# Allegro board C6503D_7_2.brd
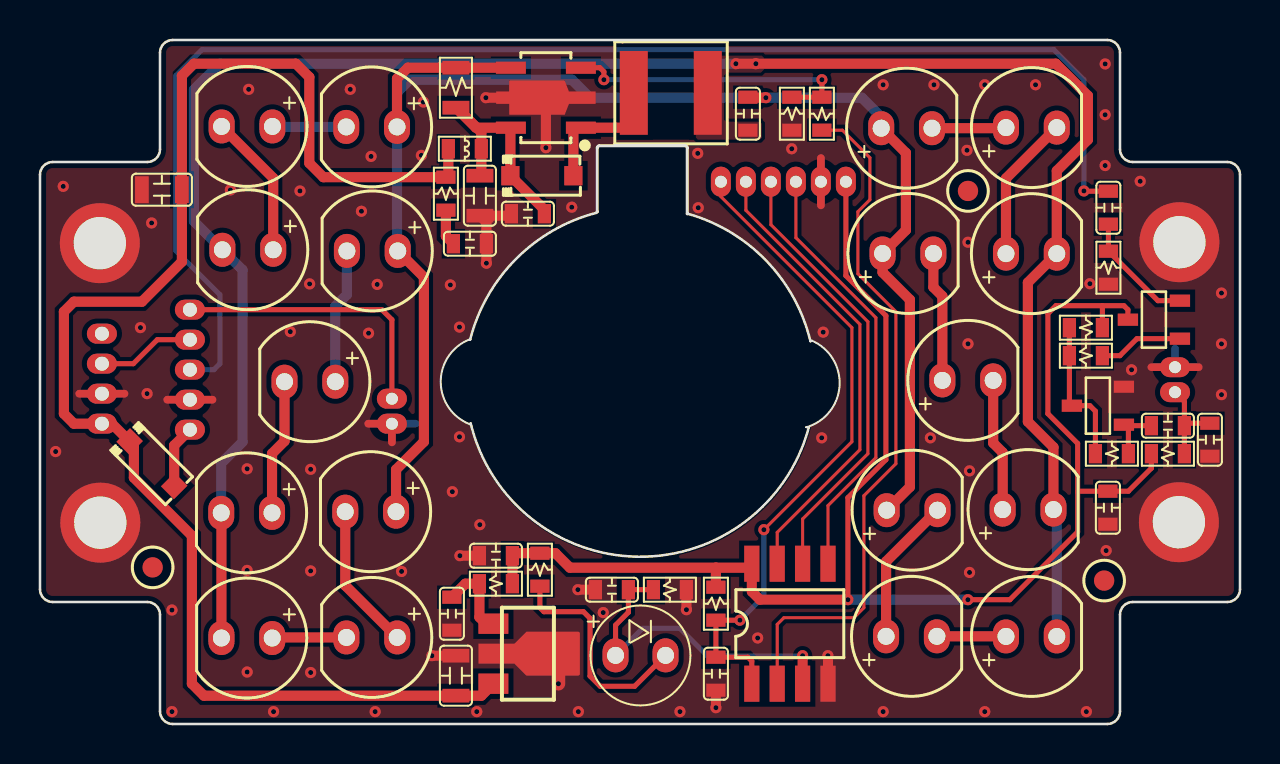
[diagram p0: board, top side]
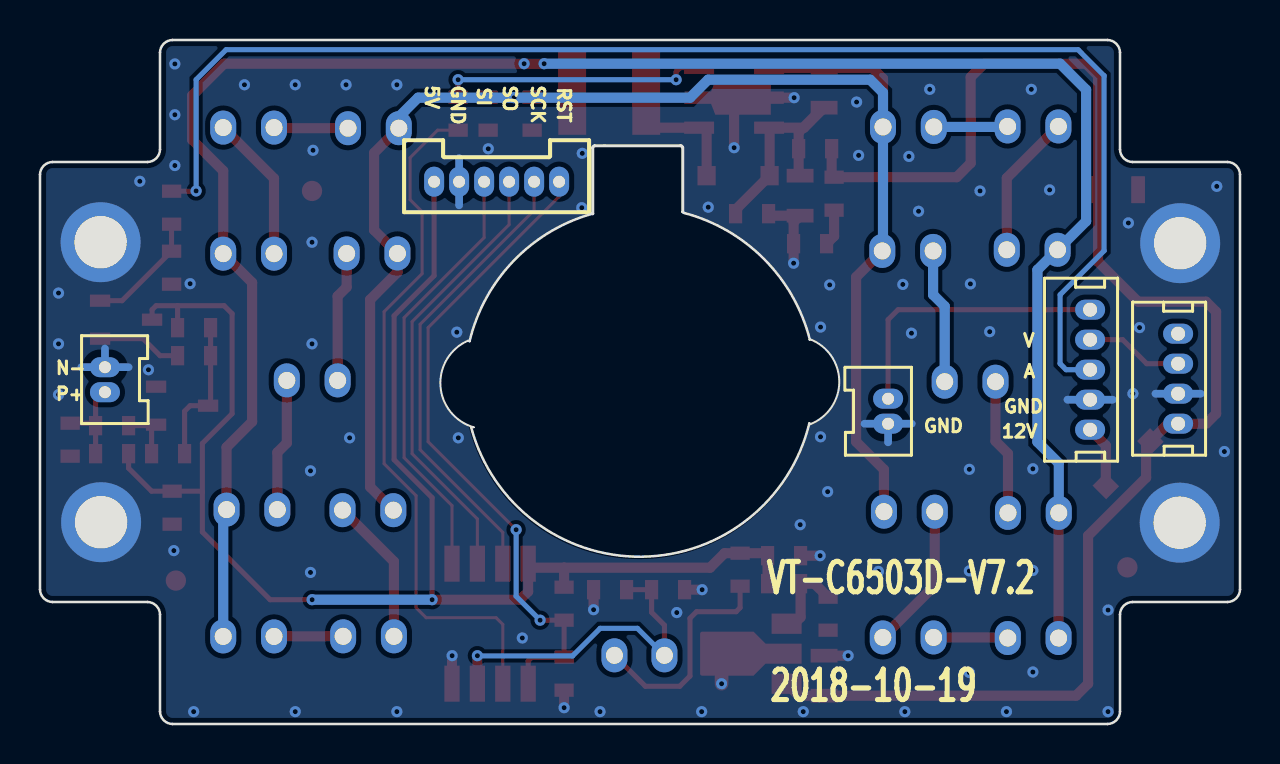
[diagram p1: board, bottom side, seen from below]

Outline 60 x 34.2 mm; copper layers: TOP, BOTTOM. Coordinates in mm from the lower left corner of the outline.
Outline path: 1.74,24.04 arc(4.24,24.09) 1.75,23.94 ; 1.77,10.07 arc(4.27,10.12) 1.77,9.97 ; 21.49,14.99 arc(20.04,17.12) 21.5,19.24 ; 21.51,19.22 arc(23.8,23.25) 27.81,25.56 ; 27.86,25.61 27.86,28.81 arc(27.89,28.88) 27.96,28.91 32.26,28.91 arc(32.33,28.88) 32.36,28.81 32.36,25.51 ; 31.8,28.94 arc(31.76,28.9) 31.73,28.94 ; 32.4,25.51 arc(36.32,23.15) 38.52,19.14 ; 38.44,14.83 arc(29.91,8.36) 21.53,15.03 ; 38.6,19.17 arc(39.98,16.9) 38.31,14.84 ; 55.7,10.09 arc(58.19,10.14) 55.7,9.99 ; 55.72,24.09 arc(58.22,24.14) 55.72,23.99 ; 0,27.46 0,6.74 arc(0.19,6.29) 0.63,6.1 5.37,6.1 arc(5.81,5.91) 6,5.47 6,0.63 arc(6.19,0.19) 6.64,0 53.36,0 arc(53.81,0.19) 54,0.63 54,5.47 arc(54.19,5.91) 54.63,6.1 59.37,6.1 arc(59.81,6.29) 60,6.74 60,27.46 arc(59.81,27.91) 59.37,28.1 54.63,28.1 arc(54.19,28.29) 54,28.73 54,33.57 arc(53.81,34.01) 53.36,34.2 6.64,34.2 arc(6.19,34.01) 6,33.57 6,28.73 arc(5.81,28.29) 5.37,28.1 0.63,28.1 arc(0.19,27.91) 0,27.46 ; 21.47,14.99 arc(21.49,15.01) 21.52,14.99 arc(21.49,14.96) 21.47,14.99 ; 21.48,19.22 arc(21.51,19.25) 21.54,19.22 arc(21.51,19.19) 21.48,19.22 ; 21.48,19.24 arc(21.5,19.26) 21.53,19.24 arc(21.5,19.21) 21.48,19.24 ; 21.5,15.03 arc(21.53,15.06) 21.57,15.03 arc(21.53,15) 21.5,15.03 ; 27.78,25.56 arc(27.81,25.59) 27.84,25.56 arc(27.81,25.52) 27.78,25.56 ; 27.83,25.61 arc(27.86,25.65) 27.9,25.61 arc(27.86,25.57) 27.83,25.61 ; 32.33,25.51 arc(32.36,25.55) 32.4,25.51 arc(32.36,25.47) 32.33,25.51 ; 32.37,25.51 arc(32.4,25.54) 32.43,25.51 arc(32.4,25.48) 32.37,25.51 ; 38.29,14.84 arc(38.31,14.86) 38.34,14.84 arc(38.31,14.81) 38.29,14.84 ; 38.41,14.83 arc(38.44,14.86) 38.47,14.83 arc(38.44,14.8) 38.41,14.83 ; 38.49,19.14 arc(38.52,19.17) 38.55,19.14 arc(38.52,19.11) 38.49,19.14 ; 38.57,19.17 arc(38.6,19.19) 38.62,19.17 arc(38.6,19.14) 38.57,19.17

## Placement (name value [footprint] x y rotation side)
C1  10uF 16V  [C0805]  6.09 26.72 180 top
C2  100nF 50V  [C0603]  21.49 24.02 0 top
C3  10uF 16V  [C0805]  22 26.42 270 top
C4  1uF 25V  [C0603]  24.39 25.52 180 top
C5  1uF 25V  [C0603]  35.39 30.52 90 top
C6  10uF 10V  [C0603]  20.59 5.52 270 top
C7  10uF 16V  [C0805]  20.8 2.42 90 top
C8  1uF 25V  [C0603]  53.39 10.82 270 top
C9  100nF 50V  [C0603]  22.8 8.42 180 top
C10  100nF 50V  [C0603]  56.4 14.92 180 top
C11  1uF 25V  [C0603]  53.42 25.82 90 top
C12  100nF 50V  [C0603]  58.49 14.22 270 top
C13  100nF 50V  [C0603]  28.6 6.72 180 top
C14  100nF 50V  [C0603]  33.8 2.52 270 top
D1  1N5819HW  [SOD123]  25.09 27.42 0 top
D2  1N5819HW  [SOD123]  5.59 13.02 315 top
D3  IR-90  [LED_DIP_I2_54_F5]  10.33 10.56 180 top
D4  IR-90  [LED_DIP_I2_54_F5]  10.39 23.71 180 top
D5  IR-90  [LED_DIP_I2_54_F5]  10.34 4.3 180 top
D6  IR-90  [LED_DIP_I2_54_F5]  49.57 4.38 0 top
D7  IR-90  [LED_DIP_I2_54_F5]  49.4 10.72 0 top
D8  IR-90  [LED_DIP_I2_54_F5]  49.57 23.52 0 top
D9  IR-90  [LED_DIP_I2_54_F5]  13.5 17.12 180 top
D10  IR-90  [LED_DIP_I2_54_F5]  10.35 29.88 180 top
D11  IR-90  [LED_DIP_I2_54_F5]  16.59 4.33 180 top
D12  IR-90  [LED_DIP_I2_54_F5]  43.57 4.38 0 top
D13  IR-90  [LED_DIP_I2_54_F5]  46.39 17.18 0 top
D14  IR-90  [LED_DIP_I2_54_F5]  49.57 29.82 0 top
D15  IR-90  [LED_DIP_I2_54_F5]  16.62 23.65 180 top
D16  IR-90  [LED_DIP_I2_54_F5]  16.58 29.85 180 top
D17  IR-90  [LED_DIP_I2_54_F5]  16.53 10.62 180 top
D18  IR-90  [LED_DIP_I2_54_F5]  43.6 10.69 0 top
D19  IR-90  [LED_DIP_I2_54_F5]  43.4 23.53 0 top
D20  IR-90  [LED_DIP_I2_54_F5]  43.33 29.79 0 top
D21  TACA30  [CDS]  28.78 3.43 0 top
H1  F4_D2.5  [H_4D2_5]  2.99 24.04 0 top
H2  F4_D2.5  [H_4D2_5]  3.02 10.07 0 top
H3  F4_D2.5  [H_4D2_5]  56.97 24.09 0 top
H4  F4_D2.5  [H_4D2_5]  56.95 10.09 0 top
J1  DIP 5P 1.5MM  [DIP_1X5P_I1_5_V]  7.49 14.72 90 bottom
J2  DIP 2P 1.25MM  [DIP_1X2P_1_25_V]  17.59 15.02 90 bottom
J3  DIP 4P 1.5MM  [DIP_1X4P_I1_5_V]  3.09 15.02 90 bottom
J4  DIP 2P 1.25MM  [DIP_1X2P_1_25_V]  56.75 17.84 270 bottom
J5  DIP 6P 1.25MM  [DIP_1X6P_1_25_V]  40.29 27.12 180 bottom
L1  100uH/0.57A  [L_5X5MM]  31.51 31.56 0 top
LB1  1000R/800mA  [L0603]  21.24 28.76 0 top
NOREF  -  []  42.33 10.69 0 top
NOREF#2  -  []  9.07 4.3 0 top
NOREF#3  -  []  9.12 23.71 0 top
NOREF#4  -  []  48.3 29.82 0 top
NOREF#5  -  []  42.06 29.79 0 top
NOREF#6  -  []  12.23 17.12 0 top
NOREF#7  -  []  48.13 10.72 0 top
NOREF#8  -  []  48.3 4.38 0 top
NOREF#9  -  []  42.13 23.53 0 top
NOREF#10  -  []  15.35 23.65 0 top
NOREF#11  -  [unnamed#2]  5.63 7.83 0 top
NOREF#12  -  [unnamed#2]  46.4 26.65 0 top
NOREF#13  -  []  15.26 10.62 0 top
NOREF#14  -  []  6.64 0 90 top
NOREF#15  -  []  15.31 29.85 0 top
NOREF#16  -  []  15.32 4.33 0 top
NOREF#17  -  []  48.3 23.52 0 top
NOREF#18  -  []  9.06 10.56 0 top
NOREF#19  -  []  9.08 29.88 0 top
NOREF#20  -  []  0 6.75 0 top
NOREF#21  -  []  42.3 4.38 0 top
NOREF#22  -  []  45.12 17.18 0 top
NOREF#23  -  [unnamed#2]  53.21 7.17 0 top
Q1  3904  [SOT-23]  55.7 20.22 90 top
Q2  3904  [SOT-23]  52.89 15.92 90 top
R1  2R  [R0603]  20.3 26.52 90 top
R2  0.56R 1%  [R0805]  20.79 31.82 90 top
R3  2.7K  [R0603]  39.09 30.52 270 top
R4  2.7K  [R0603]  37.59 30.52 90 top
R5  0R  [R0603]  22.8 7.02 180 top
R6  2.7K  [R0603]  52.3 19.82 0 top
R7  1K 1%  [R0603]  25 7.72 90 top
R8  10K  [R0603]  56.4 13.52 180 top
R9  470K  [R0603]  53.6 13.52 0 top
R10  560R  [R0603]  52.3 18.42 180 top
R11  560R  [R0603]  53.42 22.82 90 top
R12  100K 1%  [R0603]  31.5 6.72 180 top
R13  100K 1%  [R0603]  33.8 6.02 90 top
U1  PT4115  [SOT89-5_H1_5]  25.29 31.32 90 top
U2  78L05  [SOT-89-3]  24.4 3.52 270 top
U3  ATtiny13A  [SOP8]  37.5 5.02 0 top

## Library data of the parts
C1-C14 = CAP NP: User Part Number: pn
D1 D2 = DIODE SCHOTTKY: User Part Number: pn
D3-D20 = LED12: User Part Number: pn
D21 = MFOD1100: User Part Number: pn
H1-H4 = Hole: User Part Number: pn
J1 = CONN FLEX 5: User Part Number: pn
J2 J4 = CONN FLEX 2: User Part Number: pn
J3 = CONN FLEX 4: User Part Number: pn
J5 = CONN FLEX 6: User Part Number: pn
L1 = INDUCTOR: User Part Number: pn
LB1 = Bead_S: User Part Number: pn
Q1 Q2 = NPN BEC: User Part Number: pn
R1-R13 = R: User Part Number: pn
U1 = FP7151: User Part Number: pn
U2 = L78L18/TO92: User Part Number: pn
U3 = ATtiny13A: User Part Number: pn

## Footprints (pads in the part's own frame, mm; a bottom-side part is the same pattern mirrored in y, then rotated)
C0603
  rect 0.66x0.965 smd: 1(-0.825,0) 2(0.825,0)
C0805
  rect 0.686x1.346 smd: 1(-1,0) 2(1,0)
CDS
  oval 1.3x1.7 hole 0.85: 1(0,0) 2(2.499,0)
DIP_1X2P_1_25_V
  oval 1x1.5 hole 0.6: 1(0,0) 2(1.25,0)
DIP_1X4P_I1_5_V
  oval 1x1.5 hole 0.7: 1(0,0) 2(1.5,0) 3(3,0) 4(4.5,0)
DIP_1X5P_I1_5_V
  oval 1x1.5 hole 0.7: 1(0,0) 2(1.5,0) 3(3,0) 4(4.5,0) 5(6,0)
DIP_1X6P_1_25_V
  oval 1x1.5 hole 0.6: 1(0,0) 2(1.25,0) 3(2.5,0) 4(3.75,0) 5(5,0) 6(6.25,0)
H_4D2_5
  round 4 hole 2.5: 1(0,0)
L0603
  rect 0.66x0.965 smd: 1(-0.825,0) 2(0.825,0)
L_5X5MM
  rect 1.397x4.191 smd: 1(-1.825,0) 2(1.875,0)
LED_DIP_I2_54_F5
  oval 1.3x1.7 hole 0.85: 1(-1.27,0) 2(1.27,0)
R0603
  rect 0.66x0.965 smd: 1(-0.825,0) 2(0.825,0)
R0805
  rect 0.686x1.346 smd: 1(-1,0) 2(1,0)
SOD123
  rect 0.914x0.965 smd: 1(1.575,0) 2(-1.575,0)
SOP8
  rect 0.762x1.803 smd: 1(-1.905,-3) 2(-0.635,-3) 3(0.635,-3) 4(1.905,-3) 5(1.905,3) 6(0.635,3) 7(-0.635,3) 8(-1.905,3)
SOT89-5_H1_5
  rect 0.61x1.499 smd: 1(-1.5,-1.75) 3(1.5,-1.75) 4(1.5,1.75) 5(-1.5,1.75)
  custom 1.701x4.973 smd: 2(0,0)
SOT-23
  rect 0.61x1.016 smd: 1(-0.95,-1.3) 2(0.95,-1.3) 3(0,1.3)
SOT-89-3
  rect 1.016x1.499 smd: 1(-1.5,-1.726) 3(1.5,-1.726)
  custom 2.2x5.075 smd: 2(0,0.062)
unnamed#2
  round 1.016 smd: (0,0)

## Nets
5V: C8.1 C9.1 J5.1 Q1.3(C) R5.1 R6.2 R7.2 R8.2 R13.2 U3.8(VCC)
12V: C1.1 C7.1 D2.2(CATHODE) J3.1 LB1.1 R1.2 U2.3(IN)
GND: C1.2 C2.2 C3.2 C4.2 C6.2 C7.2 C8.2 C9.2 C12.2 C13.2 C14.2 H1.1 H2.1 H3.1 H4.1 J1.2 J2.1 J3.2 J4.1 J5.2 Q2.2(E) R4.1 R11.1 R12.1 U1.2(GND) U2.2 U3.4(GND)
#RST: C14.1 J5.6 R13.1 U3.1(#RST)
ADC2: C13.1 D21.1(CATHODE) R12.2 U3.3(PB4)
AUDIO: C11.2 J1.3
EN: R3.1 R4.2 U1.3(ADJ)
LED+: C5.2 D15.1(ANODE) D16.1(ANODE) D17.1(ANODE) D18.1(ANODE) D19.1(ANODE) D20.1(ANODE) R2.2 U1.4(ISNS)
LED-: C5.1 D3.2(CATHODE) D4.2(CATHODE) D5.2(CATHODE) D6.2(CATHODE) D7.2(CATHODE) D8.2(CATHODE) L1.2
PB3: R3.2 U3.2(PB3)
SCK: J5.5 U3.7(CLK)
SI: J5.3 U3.5(SI)
SO: J5.4 U3.6(SO)
N00313: D2.1(ANODE) J1.1
N00345: J1.5 J2.2
N00361: J1.4 J3.3
N00487: C2.1 R1.1
N02373: C3.1 C4.1 D1.2(CATHODE) LB1.2 R2.1 U1.5(VIN)
N03963: C6.1 R5.2 U2.1(OUT)
N08239: C10.1 C12.1 J4.2 R8.1
N08887: C10.2 Q2.1(B) R9.2
N08972: Q2.3(C) R6.1 R9.1 R10.2
N09596: C11.1 Q1.2(E) R11.2
N1031307: D1.1(ANODE) L1.1 U1.1(LX)
N1055245: D21.2(ANODE) R7.1
N1071009: D9.1(ANODE) D15.2(CATHODE)
N1071013: D3.1(ANODE) D9.2(CATHODE)
N1071049: D10.1(ANODE) D16.2(CATHODE)
N1071053: D4.1(ANODE) D10.2(CATHODE)
N1071121: D11.1(ANODE) D17.2(CATHODE)
N1071125: D5.1(ANODE) D11.2(CATHODE)
N1071145: D12.1(ANODE) D18.2(CATHODE)
N1071149: D6.1(ANODE) D12.2(CATHODE)
N1071233: D13.1(ANODE) D19.2(CATHODE)
N1071237: D7.1(ANODE) D13.2(CATHODE)
N1071257: D14.1(ANODE) D20.2(CATHODE)
N1071277: D8.1(ANODE) D14.2(CATHODE)
N1106105: Q1.1(B) R10.1

Pads without a net: J3 4

## Via types
v1: diameter 0.559, hole 0.254, TOP to BOTTOM, 88 vias

## Routing (per net, layer and track width the routed paths; a pad name or vN(x,y) marks a point on that pad's centre or on a via; arc(x,y) is an arc through that point)
5V: length 79.1
  TOP w0.254: 51.88,11.62 51.88,14.03 50.39,15.52 50.39,20.52 50.79,20.92 53.12,20.92 ; 51.88,11.62 51.91,11.64 C8.1 54.42,11.64 55.57,12.79 R8.2 ; 51.88,11.62 51.88,9.6 48.49,6.22 v1(46.39,6.22) ; 53.12,20.92 54.19,20.92 54.4,20.71 Q1.3 ; 53.12,20.92 R6.2 ; J5.1 40.29,22.42 42.29,20.42 42.29,13.22 40.39,11.32 v1(40.39,6.22)
  TOP w0.5: v1(40.39,6.22) 35.99,6.22 35.59,6.62 35.59,7.51
  TOP w0.508: 35.39,7.82 U3.8 ; 35.39,7.82 U3.8 ; 35.39,7.82 33.79,7.82 ; U3.8 35.59,7.51 ; R13.2 33.8,7.81 33.79,7.82 ; R5.1 C9.1 23.75,8.54 R7.2 25.77,8.54 26.5,7.82 33.79,7.82
  BOTTOM w0.508: v1(40.39,6.22) v1(46.39,6.22)
12V: length 74
  TOP w0.508: U2.3 22.07,1.42 C7.1 8.2,1.42 7.59,2.02 7.59,9.42 4.69,12.32 4.69,13.92 D2.2 3.59,15.02 J3.1 1.69,15.02 1.19,15.52 1.19,20.62 1.69,21.12 5.09,21.12 7.09,23.12 C1.1 7.09,32.42 7.69,33.02 12.79,33.02 13.47,32.34 13.47,28.04 14.17,27.34 R1.2 20.42,27.46 LB1.1
GND: length 42.3
  TOP w0.381: 1.96,16.52 J3.2 4.23,16.52 ; 57.93,17.84 J4.1 55.57,17.84 ; 16.41,15.02 J2.1 17.59,14.08 ; 39.04,28.3 J5.2 39.04,25.93 ; 8.63,16.22 J1.2 6.36,16.22
  TOP w0.5: C14.2 v1(33.8,0.82) ; U3.4 39.4,3.42 v1(39.39,3.42) ; C13.2 v1(26.89,6.72)
  TOP w0.508: C9.2 v1(21,8.42) ; v1(22.29,31.32) U1.2 v1(25.29,28.82) ; C7.2 v1(19.6,3.42) ; v1(22.32,23.04) C2.2 22.32,25.09 C3.2 23.47,25.42 C4.2 ; R12.1 v1(32.32,5.72)
  TOP w0.68: v1(25.92,2.02) 25.92,3.52
  BOTTOM w0.381: J4.1 57.93,17.84 ; J4.1 56.75,18.77 ; J4.1 55.57,17.84 ; 4.23,16.52 J3.2 1.96,16.52 ; 6.36,16.22 J1.2 8.63,16.22 ; 39.04,25.93 J5.2 39.04,28.3 ; 16.41,15.02 J2.1 ; J2.1 17.59,14.08 ; J2.1 18.78,15.02
  vias: v1(0.78,13.62) v1(1.16,26.88) v1(5.02,19.82) v1(5.35,16.52) v1(5.58,25.05) v1(6.6,5.7) v1(6.6,0.62) v1(9.52,26.7) v1(10.36,12.76) v1(10.36,7.68) v1(10.36,2.6) v1(10.43,31.73) v1(11.68,0.62) v1(12.52,19.62) v1(13,26.65) v1(13.48,22) v1(13.53,12.73) v1(13.53,7.65) v1(13.53,2.57) v1(15.51,31.73) v1(16.07,25.64) v1(16.43,19.54) v1(16.55,28.38) v1(16.76,0.62) v1(16.86,21.98) v1(18.08,7.63) v1(19.07,28.43) v1(19.17,31.1) v1(20.52,21.95) v1(20.62,11.62) v1(20.97,19.85) v1(20.97,14.36) v1(21.84,0.62) v1(21.99,9.97) v1(26.59,25.84) v1(26.92,0.62) v1(28.16,5.57) v1(32,0.62) v1(32.89,28.53) v1(32.91,25.81) v1(35.88,4.3) v1(37.59,28.76) v1(39.16,19.59) v1(39.08,14.31) v1(42.16,31.96) v1(42.16,0.62) v1(44.52,14.31) v1(44.7,31.96) v1(46.35,28.68) v1(46.4,24.09) v1(46.4,19.01) v1(46.48,12.66) v1(46.48,7.58) v1(47.24,31.96) v1(47.24,0.62) v1(49.78,31.96) v1(52.32,0.62) v1(52.49,22.02) v1(53.26,33) v1(53.26,30.46) v1(53.26,27.92) v1(53.31,8.67) v1(54.58,17.71) v1(55.01,27.14) v1(59.07,21.55) v1(59.07,19.01) v1(59.07,16.47)
#RST: length 33
  TOP w0.152: v1(36.19,9.72) 40.59,14.12 40.59,19.82 34.04,26.37 J5.6
  TOP w0.254: U3.1 35.59,3.14 35.39,3.34 C14.1 R13.1 v1(34.99,5.19)
  BOTTOM w0.254: v1(36.19,9.72) 36.19,6.39 v1(34.99,5.19)
ADC2: length 16.7
  TOP w0.254: R12.2 C13.1 29.42,5.58 28.78,4.94 D21.1
  TOP w0.5: U3.3 v1(38.13,3.42)
  BOTTOM w0.254: D21.1 30.13,4.78 31.99,4.78 33.37,3.4 38.12,3.4 v1(38.13,3.42)
AUDIO: length 70.3
  TOP w0.254: v1(52.19,26.65) 52.26,26.65 52.27,26.64 C11.2
  BOTTOM w0.254: v1(52.19,26.65) 52.19,32.22 50.69,33.72 8.1,33.72 6.79,32.42 6.79,23.66 8.99,21.46 8.99,18.02 8.69,17.72 J1.3
EN: length 14.9
  TOP w0.254: R4.2 R3.1 v1(39.09,32.22) ; U1.3 27.99,32.82 28.19,32.62 v1(28.19,32.22)
  BOTTOM w0.254: v1(28.19,32.22) v1(39.09,32.22)
LED+: length 78.3
  TOP w0.508: D16.1 17.85,32.27 18.39,32.82 R2.2 U1.4 ; D20.1 43.29,28.56 43.29,24.69 D19.1 42.13,22.58 43.49,21.22 43.49,11.85 D18.1 ; D17.1 17.8,12.72 19.19,14.12 19.19,22.34 D15.1 ; v1(36.29,31.32) 35.42,31.32 C5.2
  BOTTOM w0.508: D15.1 17.85,23.69 D16.1 17.85,31.57 18.49,32.22 26.6,32.22 27.5,31.32 v1(36.29,31.32) 41.09,31.32 42.06,30.35 D20.1
LED-: length 103.6
  TOP w0.508: v1(34.79,33.02) v1(35.79,33.02) 50.79,33.02 52.39,31.42 52.39,29.22 50.84,27.66 D8.2 49.39,22.07 49.39,15.12 50.67,13.84 D7.2 ; D5.2 9.07,10.55
  TOP w0.68: 9.07,10.55 D3.2
  BOTTOM w0.5: 9.06,13.04 D3.2
  BOTTOM w0.508: D6.2 50.84,10.55 D7.2 ; v1(34.79,33.02) 8.99,33.02 7.69,31.72 7.69,25.14 D4.2 10.13,22.7 10.13,14.11 9.06,13.04
PB3: length 34.8
  TOP w0.152: U3.2 36.86,4.98 37.19,5.31 40.69,5.31 41.19,5.82 41.19,11.42 42.79,13.02 42.79,20.62 40.89,22.52 40.89,25.62 41.49,26.22 41.49,28.32 40.12,29.69 R3.2
SCK: length 23.2
  TOP w0.152: U3.7 36.86,9.58 40.99,13.72 40.99,19.98 35.29,25.68 J5.5
SI: length 21.7
  TOP w0.152: J5.3 37.79,24.32 41.79,20.32 41.79,13.32 39.4,10.92 U3.5
SO: length 22.5
  TOP w0.152: U3.6 38.13,10.25 41.39,13.52 41.39,20.12 36.54,24.97 J5.4
N00313: length 3.1
  TOP w0.508: J1.1 6.71,13.93 D2.1
N00345: length 14.3
  TOP w0.254: J2.2 17.59,20.22 17.09,20.72 J1.5
N00361: length 4.9
  TOP w0.254: J3.3 4.67,18.02 5.87,19.22 J1.4
N00487: length 1.8
  TOP w0.508: C2.1 20.3,24.39 R1.1
N02373: length 12.5
  TOP w0.508: 23.52,29.82 21.79,29.82 R2.1 ; 23.52,29.82 D1.2 25.22,25.72 C4.1 ; 23.52,29.82 U1.5 ; R2.1 20.42,30.82 ; R2.1 20.84,30.82 22.07,29.59 LB1.2 22.07,27.49 C3.1
N03963: length 4.2
  TOP w0.508: U2.1 22.29,5.02 21.97,5.34 R5.2 21.27,7.02 C6.1
N08239: length 4.6
  TOP w0.254: J4.2 57.22,16.12 C10.1 ; C10.1 57.35,15.04 C12.1 ; C10.1 R8.1
N08887: length 2.9
  TOP w0.254: R9.2 54.42,14.74 54.24,14.92 ; 54.24,14.92 C10.2 ; 54.24,14.92 Q2.1
N08972: length 7.4
  TOP w0.254: R9.1 52.77,15.64 52.49,15.92 Q2.3 51.47,16.04 R10.2 R6.1
N09596: length 6
  TOP w0.254: Q1.2 55.9,21.17 R11.2 53.42,24.99 C11.1
N1031307: length 7.2
  TOP w0.508: D1.1 26.67,29.82 U1.1 29.69,29.82 L1.1
N1055245: length 11.3
  TOP w0.254: R7.1 25,5.81 25.19,5.62 27.17,5.62 27.5,5.28 27.5,2.4 28.01,1.89 29.73,1.89 D21.2
N1071009: length 6.8
  BOTTOM w0.508: D15.2 15.35,21.47 14.77,20.89 D9.1
N1071013: length 6.8
  TOP w0.508: D9.2 12.23,14.15 11.6,13.52 D3.1
N1071049: length 3.7
  BOTTOM w0.508: D10.1 11.65,29.85 D16.2
N1071053: length 7.2
  TOP w0.508: D4.1 11.66,27.3 D10.2
N1071121: length 7.4
  TOP w0.508: D17.2 15.26,6.93 D11.1
N1071125: length 3.7
  TOP w0.508: D11.2 11.64,4.33 D5.1
N1071145: length 7.4
  TOP w0.508: D12.1 42.3,8.12 D18.2
N1071149: length 3.5
  TOP w0.508: D6.1 48.29,4.38 D12.2
N1071233: length 6.5
  TOP w0.508: D19.2 44.67,21.84 45.12,21.39 D13.1
N1071237: length 6.7
  TOP w0.508: D7.1 48.13,13.58 47.66,14.05 D13.2
N1071257: length 3.7
  TOP w0.508: D20.2 48.27,29.79 D14.1
N1071277: length 7.4
  TOP w0.508: D14.2 48.3,27.28 D8.1
N1106105: length 4.2
  TOP w0.254: Q1.1 54.85,19.27 54,18.42 R10.1

## Copper pours and planes (outline as drawn; the poured copper is in the pictures)
GND on TOP: 6.64,0.3 6.4,0.4 6.3,0.63 6.3,5.47 6.03,6.13 5.37,6.4 0.63,6.4 0.4,6.5 0.3,6.74 0.3,27.46 0.4,27.7 0.63,27.8 5.37,27.8 6.03,28.07 6.3,28.73 6.3,33.57 6.4,33.8 6.64,33.9 30.32,33.9 30.32,29.35 30.45,29.22 32.58,29.22 32.66,29.29 32.66,33.89 32.65,33.9 53.36,33.9 53.6,33.8 53.7,33.57 53.7,28.73 53.97,28.07 54.63,27.8 59.37,27.8 59.6,27.7 59.7,27.46 59.7,6.74 59.6,6.5 59.37,6.4 54.63,6.4 53.97,6.13 53.7,5.47 53.7,0.63 53.6,0.4 53.36,0.3
GND on BOTTOM: 59.7,6.74 59.6,6.5 59.37,6.4 54.63,6.4 53.97,6.13 53.7,5.47 53.7,0.63 53.6,0.4 53.36,0.3 6.64,0.3 6.4,0.4 6.3,0.63 6.3,5.47 6.03,6.13 5.37,6.4 0.63,6.4 0.4,6.5 0.3,6.74 0.3,27.46 0.4,27.7 0.63,27.8 5.37,27.8 6.03,28.07 6.3,28.73 6.3,33.57 6.4,33.8 6.64,33.9 53.36,33.9 53.6,33.8 53.7,33.57 53.7,28.73 53.97,28.07 54.63,27.8 59.37,27.8 59.6,27.7 59.7,27.46
LED- on TOP: 32.89,33.42 36.09,33.42 36.19,33.32 36.19,32.72 36.04,32.57 34.34,32.57 34.19,32.42 34.19,30.22 34.29,30.12 35.99,30.12 36.09,30.02 36.09,29.32 35.99,29.22 32.89,29.22 32.79,29.32 32.79,33.32

## Text on the board
Ref Des/Silkscreen Bottom: A | V | GND | 12V | N- | P+ | RST | SCK | SO | SI | 5V | 2018-10-19 | VT-C6503D-V7.2
User.45: FIGURE | SIZE | 10.0 | 23.622 | 27.559 | 33.465 | 98.425 | DRILL CHART: TOP to BOTTOM | ALL UNITS ARE IN MILS | PLATED | QTY | 88 | 10 | 9 | 38 | 4
